# EAGLE board rev_d (EAGLE 8.6.0)
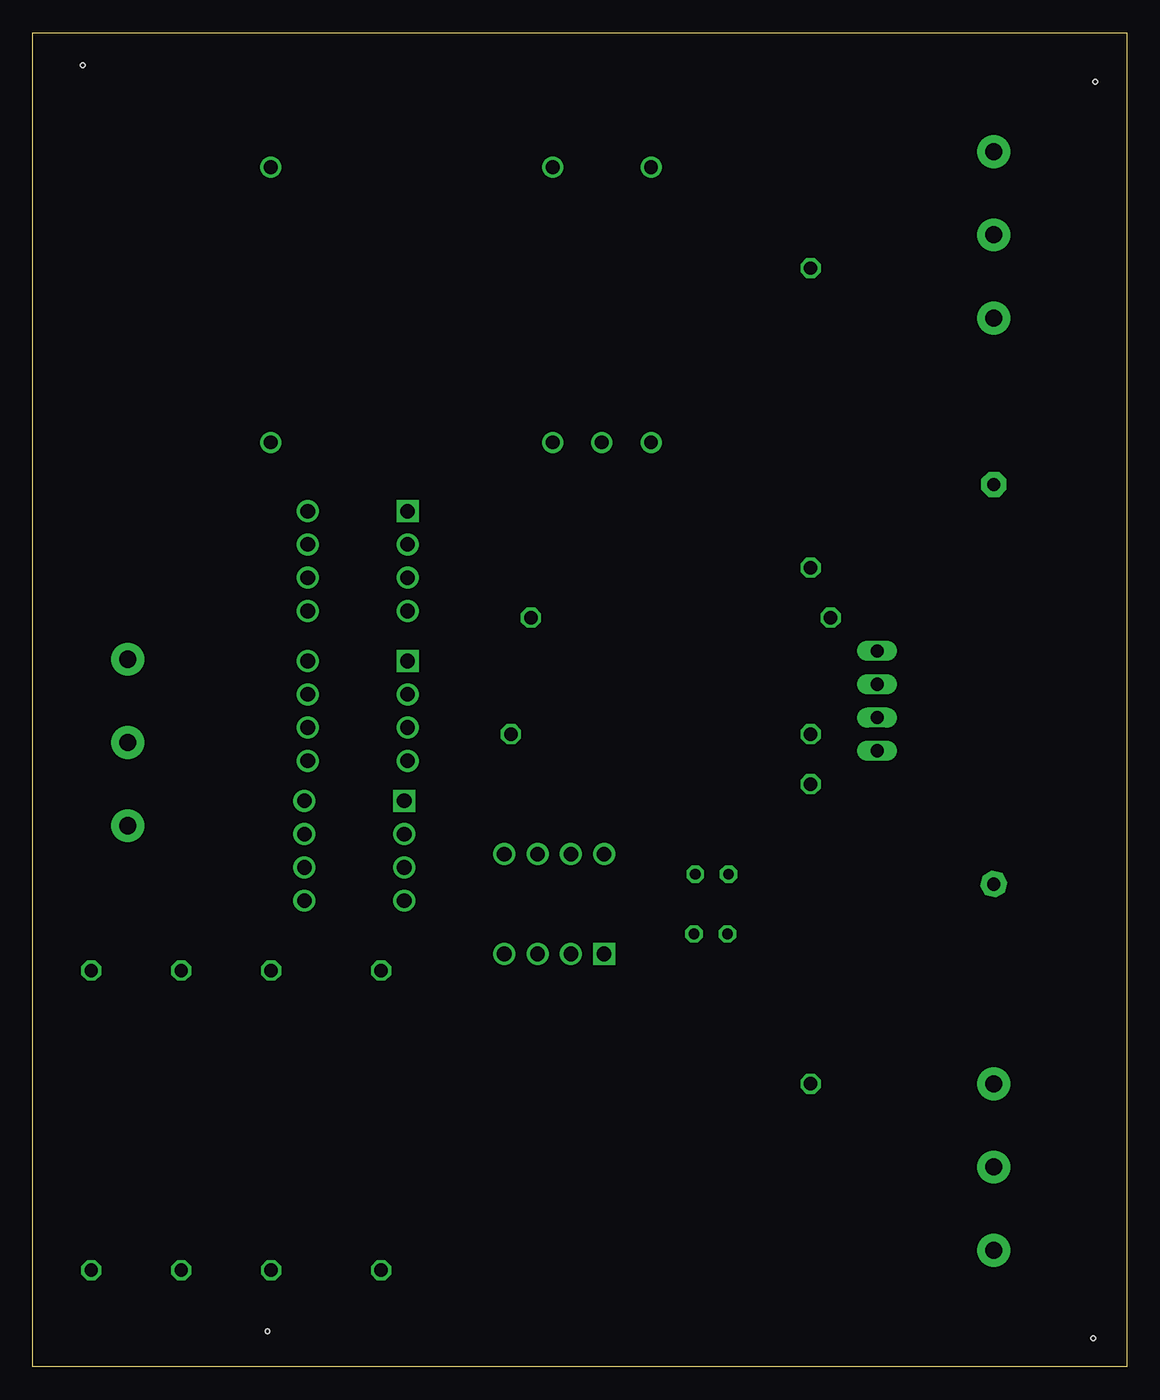
[diagram p0: board, top side]
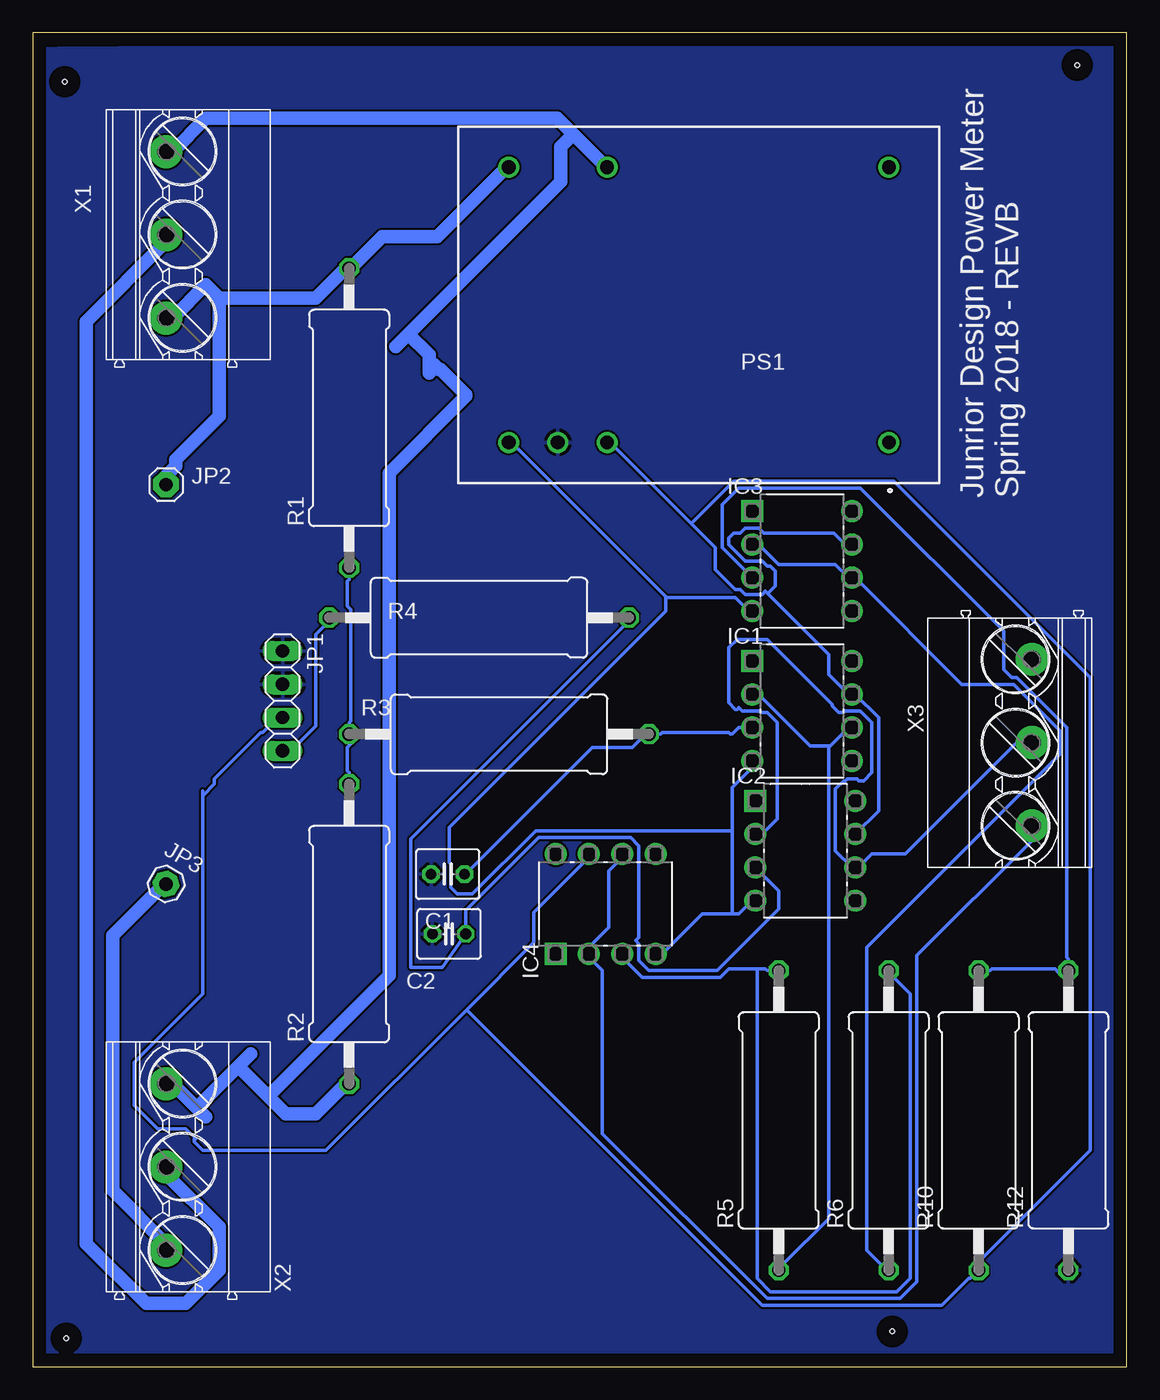
[diagram p1: board, bottom side, seen from below]

Size 83.46 x 101.78 mm. Coordinates in mm from the lower left corner, seen from the top.
Outline: 83.46,0 0,0 0,101.78 83.46,101.78 83.46,0
Copper layers (1*16): Top 0.035mm / dielectric 1.5mm / Bottom 0.035mm
Design rules "default": minimum track width 6mil, minimum drill 0.35mm, track to track 6mil, track to pad 6mil, pad to pad 6mil, via to via 6mil, smd to smd 6mil, copper to edge 40mil, drill to drill 6mil, minimum pad ring 10mil, minimum via ring 8mil, stop-mask expansion 4mil, vias tented up to drill 0mil, thermal gap 10mil
Net classes: 1 High Voltage: width 1.016 mm, clearance 1.016 mm
Holes 0.35 mm at 3.8,99.32 80.9,2.18 81.02,98.05 17.9,2.69

## Footprints (pad centres in the part's own frame; a part is rotated, then mirrored left to right if it is on the bottom)
C025-040X050 = drill 0.813 octagon: 1 -1.27,0; 2 1.27,0
DIP254P762X508-8 = drill 1.118 pad 1.676 square: 1 -7.62,7.62 | drill 1.118 pad 1.676: 2 -7.62,5.08; 3 -7.62,2.54; 4 -7.62,0; 5 0,0; 6 0,2.54; 7 0,5.08; 8 0,7.62
1X04 = drill 1.016 long: 1 -3.81,0; 2 -1.27,0; 3 1.27,0; 4 3.81,0
1X01 = drill 1.016 pad 1.93 octagon: 1 0,0
RAC04-0512DC230 = drill 1.05 pad 1.6: 1 -14.5,10.5; 2 7,10.5; 3 10.75,10.5; 4 14.5,10.5; 5 14.5,-10.5; 6 7,-10.5; 7 -14.5,-10.5
0617/22 = drill 1.016 octagon: 1 -11.43,0; 2 11.43,0
MKDS_5/3-635 = drill 1.3 pad 2.5: 1 -6.35,0; 2 0,0; 3 6.35,0

## Placement (x,y rotation side)
C1  26.525n  [C025-040X050]  51.8,37.58 180 bottom
C2  26.525n  [C025-040X050]  51.71,33.02 180 bottom
IC1  LM741CN  [DIP254P762X508-8]  20.97,46.23 0 bottom
IC2  LM741CN  [DIP254P762X508-8]  20.72,35.56 0 bottom
IC3  LM741CN  [DIP254P762X508-8]  20.97,57.66 0 bottom
IC4  LM741CN  [DIP254P762X508-8]  35.96,39.12 90 bottom
JP1  [1X04]  64.41,50.8 270 bottom
JP2  [1X01]  73.3,67.31 0 bottom
JP3  [1X01]  73.3,36.83 329.8 bottom
PS1  RAC04-05DC_230  [RAC04-0512DC230]  32.66,81.03 180 bottom
R1  10.67Meg  [0617/22]  59.33,72.39 90 bottom
R2  100k  [0617/22]  59.33,33.02 90 bottom
R3  100k  [0617/22]  47.9,48.26 0 bottom
R4  100k  [0617/22]  49.42,57.15 0 bottom
R5  20k  [0617/22]  26.56,18.8 90 bottom
R6  10k  [0617/22]  18.18,18.8 90 bottom
R10  3k  [0617/22]  11.32,18.8 90 bottom
R12  2k  [0617/22]  4.46,18.8 90 bottom
X1  MKDS_5/3-6,35  [MKDS_5/3-635]  73.3,86.36 90 bottom
X2  MKDS_5/3-6,35  [MKDS_5/3-635]  73.3,15.24 90 bottom
X3  MKDS_5/3-6,35  [MKDS_5/3-635]  7.24,47.63 270 bottom

## Library data of the parts
C1 C2 = resistor; MPN: MC0805B224K500A5.08MM; OC_NEWARK: 46P6280
IC1-IC4 = SamacSys_Parts; ARROW_PART_NUMBER: LM741CN; ARROW_PRICE/STOCK: http://uk.rs-online.com/web/p/products/4718749; DESCRIPTION: OP AMP; HEIGHT: mm; MANUFACTURER_NAME: National Semiconductor; MANUFACTURER_PART_NUMBER: LM741CN; RS_PART_NUMBER: 4718749; RS_PRICE/STOCK: http://uk.rs-online.com/web/p/products/4718749
JP1 = pinhead
JP2 JP3 = adafruit
PS1 = SamacSys_Parts; DESCRIPTION: Recom 4W Dual Output Embedded Switch Mode Power Supply SMPS, 400mA, 5V dc; HEIGHT: mm; MANUFACTURER_NAME: RECOM Power; MANUFACTURER_PART_NUMBER: RAC04-05DC/230; RS_PART_NUMBER: 1666726; RS_PRICE/STOCK: http://uk.rs-online.com/web/p/products/1666726
R1 = resistor; OC_NEWARK: unknown
R2 = resistor; MPN: MFR3-100KFC; OC_NEWARK: 78R4845
R3 R4 = resistor; MPN: MFR3-1K0FC; OC_NEWARK: 78R4838
R5 = resistor; MPN: MFR4-20KFI; OC_NEWARK: 78R4890
R6 = resistor; MPN: CCF5510K0FKE36; OC_NEWARK: 71M1030
R10 = resistor; MPN: MFR4 3K3 1%; OC_NEWARK: 97K4870
R12 = resistor; MPN: MFR4-2K0FI; OC_NEWARK: 78R4886
X1 X2 = con-phoenix-mkds_5; MF: FARNELL; MPN: 1714968; OC_FARNELL: 3704695; OC_NEWARK: 71C4092
X3 = con-phoenix-mkds_5; MF: FARNELL; MPN: 1714968; OC_FARNELL: 3704695; OC_NEWARK: 71C4092; SPICEPREFIX: X

## Nets
CURRENT_LPF_OUT: IC2.2 IC2.6 X3.2
CURRENT_SENSOR: JP1.4 R4.1
DC_OFFSET: IC3.2 IC3.6 R6.1
GND: C1.2 C2.2 JP1.1 JP1.2 PS1.3 R12.1
GROUND [High Voltage]: X1.2 X2.2
HOT_WIRE_IN [High Voltage]: JP2.1 PS1.5 R1.2 X1.1
HOT_WIRE_OUT [High Voltage]: JP3.1 X2.1
MICRO_VREAD: IC4.2 IC4.6 X3.3
N$1: C1.1 IC1.3 R3.2
N$6: C2.1 IC2.3 R4.2
N$8: IC4.3 R5.2 R6.2
N$11: IC3.3 R10.2 R12.2
NEUTRAL [High Voltage]: PS1.6 R2.1 X1.3 X2.3
V+: IC1.7 IC2.7 IC3.7 IC4.7 JP1.3 PS1.2 R10.1
V-: IC1.4 IC2.4 IC3.4 IC4.4 PS1.4
VOLT_LPF_OUT: IC1.2 IC1.6 R5.1
VOLT_SENSOR: R1.1 R2.2 R3.1

## Tracks (layer width: path | path; a pad name or v marks a point on that pad's centre or on a via)
CURRENT_LPF_OUT
  Bottom 0.254: IC2.2 27.83,40.64 26.69,41.78 26.69,49.15 27.45,49.91 27.96,49.91 28.08,50.04 29.35,50.04 29.61,50.29 29.74,50.16 29.86,50.16 30.37,50.67 30.37,54.86 29.74,55.5 27.45,55.5 22.5,50.55 22.5,50.42 21.99,49.91 21.61,49.91 21.48,50.04 20.34,50.04 19.45,49.15 19.45,45.34 20.08,44.7 20.46,44.7 20.59,44.83 21.35,44.83 21.48,44.7 21.61,44.7 22.24,44.07 22.24,39.37 20.97,38.1 IC2.6 20.46,38.1 19.45,39.12 16.91,39.12 8.4,47.62 7.26,47.62 X3.2
CURRENT_SENSOR
  Bottom 0.254: JP1.4 63.77,46.99 61.87,48.9 61.87,55.88 60.85,56.9 R4.1
DC_OFFSET
  Bottom 0.254: R6.1 18.56,7.75 18.69,7.75 19.83,8.89 19.83,32 5.1,46.74 5.1,48.51 8.65,52.07 12.59,52.07 20.72,60.2 IC3.6 21.23,60.2 22.24,61.21 26.56,61.21 28.08,62.74 IC3.2
GND
  pour Bottom: 86.25,100.58 86,0 -7.73,0.25 -6.71,101.35
GROUND
  Bottom 1.016: X2.2 73.3,14.73 69.23,10.67 69.23,7.37 71.77,4.83 74.82,4.83 79.39,9.4 79.39,79.76 73.3,85.85 X1.2
HOT_WIRE_IN
  Bottom 1.016: 69.23,81.53 61.87,81.53 59.58,83.82 R1.2 58.95,84.07 56.79,86.23 52.6,86.23 47.39,91.44 47.26,91.44 PS1.5 | 69.23,81.53 70.25,82.55 72.79,80.01 X1.1 | JP2.1 73.3,67.94 72.53,68.71 72.53,69.22 69.23,72.52 69.23,81.53
HOT_WIRE_OUT
  Bottom 1.016: JP3.1 73.55,36.58 73.68,36.58 77.36,32.89 77.36,13.46 73.3,9.4 X2.1
MICRO_VREAD
  Bottom 0.254: IC4.6 38.5,38.86 39.51,37.85 39.51,33.53 41.04,32 IC4.2 41.04,31.24 40.02,30.23 40.02,17.78 27.45,5.21 17.29,5.21 16.02,6.48 16.02,31.37 7.26,40.13 7.26,41.27 X3.3
N$1
  Bottom 0.254: C1.1 50.44,37.59 40.78,47.24 37.74,47.24 36.72,48.26 R3.2 35.58,48.26 35.45,48.39 30.37,48.39 30.24,48.26 30.12,48.26 29.61,48.77 IC1.3
N$6
  Bottom 0.254: R4.2 37.99,56.9 54.63,40.26 54.63,30.48 52.21,30.48 C2.1 50.44,34.8 44.85,40.39 37.86,40.39 37.23,39.75 37.23,32.77 37.48,32.51 37.23,32.26 37.23,30.99 36.47,30.23 31.26,30.23 26.56,34.92 26.56,36.32 IC2.3
N$8
  Bottom 0.254: R5.2 27.45,30.23 27.58,30.35 28.21,30.35 | 28.21,30.35 30.37,30.35 31.01,29.72 36.97,29.72 38.5,31.24 IC4.3 | R6.2 17.8,29.84 17.8,29.72 16.53,28.45 16.53,6.73 17.54,5.71 27.2,5.71 28.21,6.73 28.21,30.35
N$11
  Bottom 0.254: R10.2 10.43,30.23 10.3,30.35 5.48,30.35 5.22,30.1 4.59,30.1 R12.2 4.46,31.11 4.59,31.24 4.59,48.77 8.4,52.58 8.78,52.58 9.42,53.21 9.42,56.13 20.34,67.06 29.61,67.06 30.88,65.79 30.88,62.48 IC3.3
NEUTRAL
  Bottom 1.016: 70.95,19.75 72.79,21.59 X2.3 | 70.95,19.75 70.25,19.05 | 42.24,94.04 43.45,95.25 70.25,95.25 72.79,92.71 X1.3 | 42.24,94.04 39.77,91.57 PS1.6 | 54.82,78.8 43.2,90.42 43.2,93.09 42.24,94.04 | 54.82,78.8 55.77,77.85 | 70.95,19.75 67.77,22.92 | 67.77,22.92 66.82,23.88 | 53.23,76.45 53.23,77.22 54.82,78.8 | 53.23,76.45 53.23,75.82 | R2.1 59.58,21.59 61.87,19.3 64.15,19.3 65.49,20.64 | 67.77,22.92 65.49,20.64 | 65.49,20.64 56.28,29.84 56.28,68.2 50.44,74.04 50.44,74.17 52.34,76.07 52.47,76.07 52.85,76.45 53.23,76.45
V+
  Bottom 0.254: 70.5,43.56 70.5,28.45 75.71,23.24 75.71,19.94 73.93,18.16 71.77,18.16 71.07,17.46 | 70.5,43.56 70.5,43.94 | 71.01,17.4 71.07,17.46 | 70.5,43.56 69.61,44.45 69.61,44.83 66.06,48.39 65.93,48.39 64.79,49.53 JP1.3 | 71.07,17.46 71.14,17.4 71.14,17.14 70.5,16.51 61.1,16.51 50.37,27.24 | 33.23,64.33 31.39,62.48 31.39,60.83 29.86,59.31 29.48,59.31 29.1,58.93 27.83,58.93 27.58,59.18 27.39,58.99 | 33.23,64.33 39.39,70.48 39.64,70.48 PS1.2 | 27.39,58.99 22.75,54.36 22.75,52.83 21.23,51.31 IC1.7 20.72,51.31 18.94,49.53 18.94,42.42 IC2.7 | IC3.7 21.48,62.74 22.37,63.63 27.7,63.63 28.08,64.01 29.1,64.01 29.48,63.63 29.99,63.63 30.37,63.25 30.37,62.74 29.1,61.47 27.83,61.47 27.45,61.09 27.2,61.09 26.81,60.71 26.81,59.56 27.39,58.99 | 50.37,27.24 45.23,32.38 45.23,34.67 41.04,38.86 IC4.7 | 50.37,27.24 27.83,4.7 14.11,4.7 12.08,6.73 11.96,6.73 R10.1 11.32,8 2.81,16.51 2.81,52.58 17.8,67.56 29.99,67.56 33.23,64.33
V-
  Bottom 0.254: IC4.4 35.45,31.5 32.4,34.54 30.12,34.54 | 30.12,34.54 29.61,34.54 28.59,35.56 IC2.4 | IC1.4 28.59,45.72 30.12,44.2 30.12,40.89 | 30.12,34.54 30.12,40.89 | 35.13,58.74 35.07,58.67 29.86,58.67 28.85,57.66 IC3.4 | 35.13,58.74 46.88,70.48 47.13,70.48 PS1.4 | 30.12,40.89 45.1,40.89 49.93,36.07 51.07,36.07 51.58,36.58 51.58,38.35 51.71,38.48 51.71,41.15 35.2,57.66 35.2,58.67 35.13,58.74
VOLT_LPF_OUT
  Bottom 0.254: R5.1 26.18,7.75 26.18,7.87 22.75,11.3 22.75,47.24 22.69,47.31 | 22.69,47.31 21.23,48.77 IC1.6 | IC1.2 28.08,51.31 24.15,47.37 22.75,47.37 22.69,47.31
VOLT_SENSOR
  Bottom 0.254: R2.2 59.33,45.34 59.45,45.47 59.45,47.24 59.2,47.5 59.2,48.13 R3.1 59.33,49.15 59.2,49.28 59.2,57.78 59.45,58.04 59.45,59.94 59.33,60.07 R1.1

## Text on the board
bNames: Junrior Design Power Meter / Spring 2018 - REVB